# Altium PCB PCB1.pcbdoc (part 3 of 3)
Units mil, origin at the board's own origin, x right, y up, seen from the top; angles counter-clockwise.
Board outline 4439.01 x 4693.87 mil, 2 copper layers (Top Layer, Bottom Layer); 119 components, 135 nets, 555 pads, 196 vias.
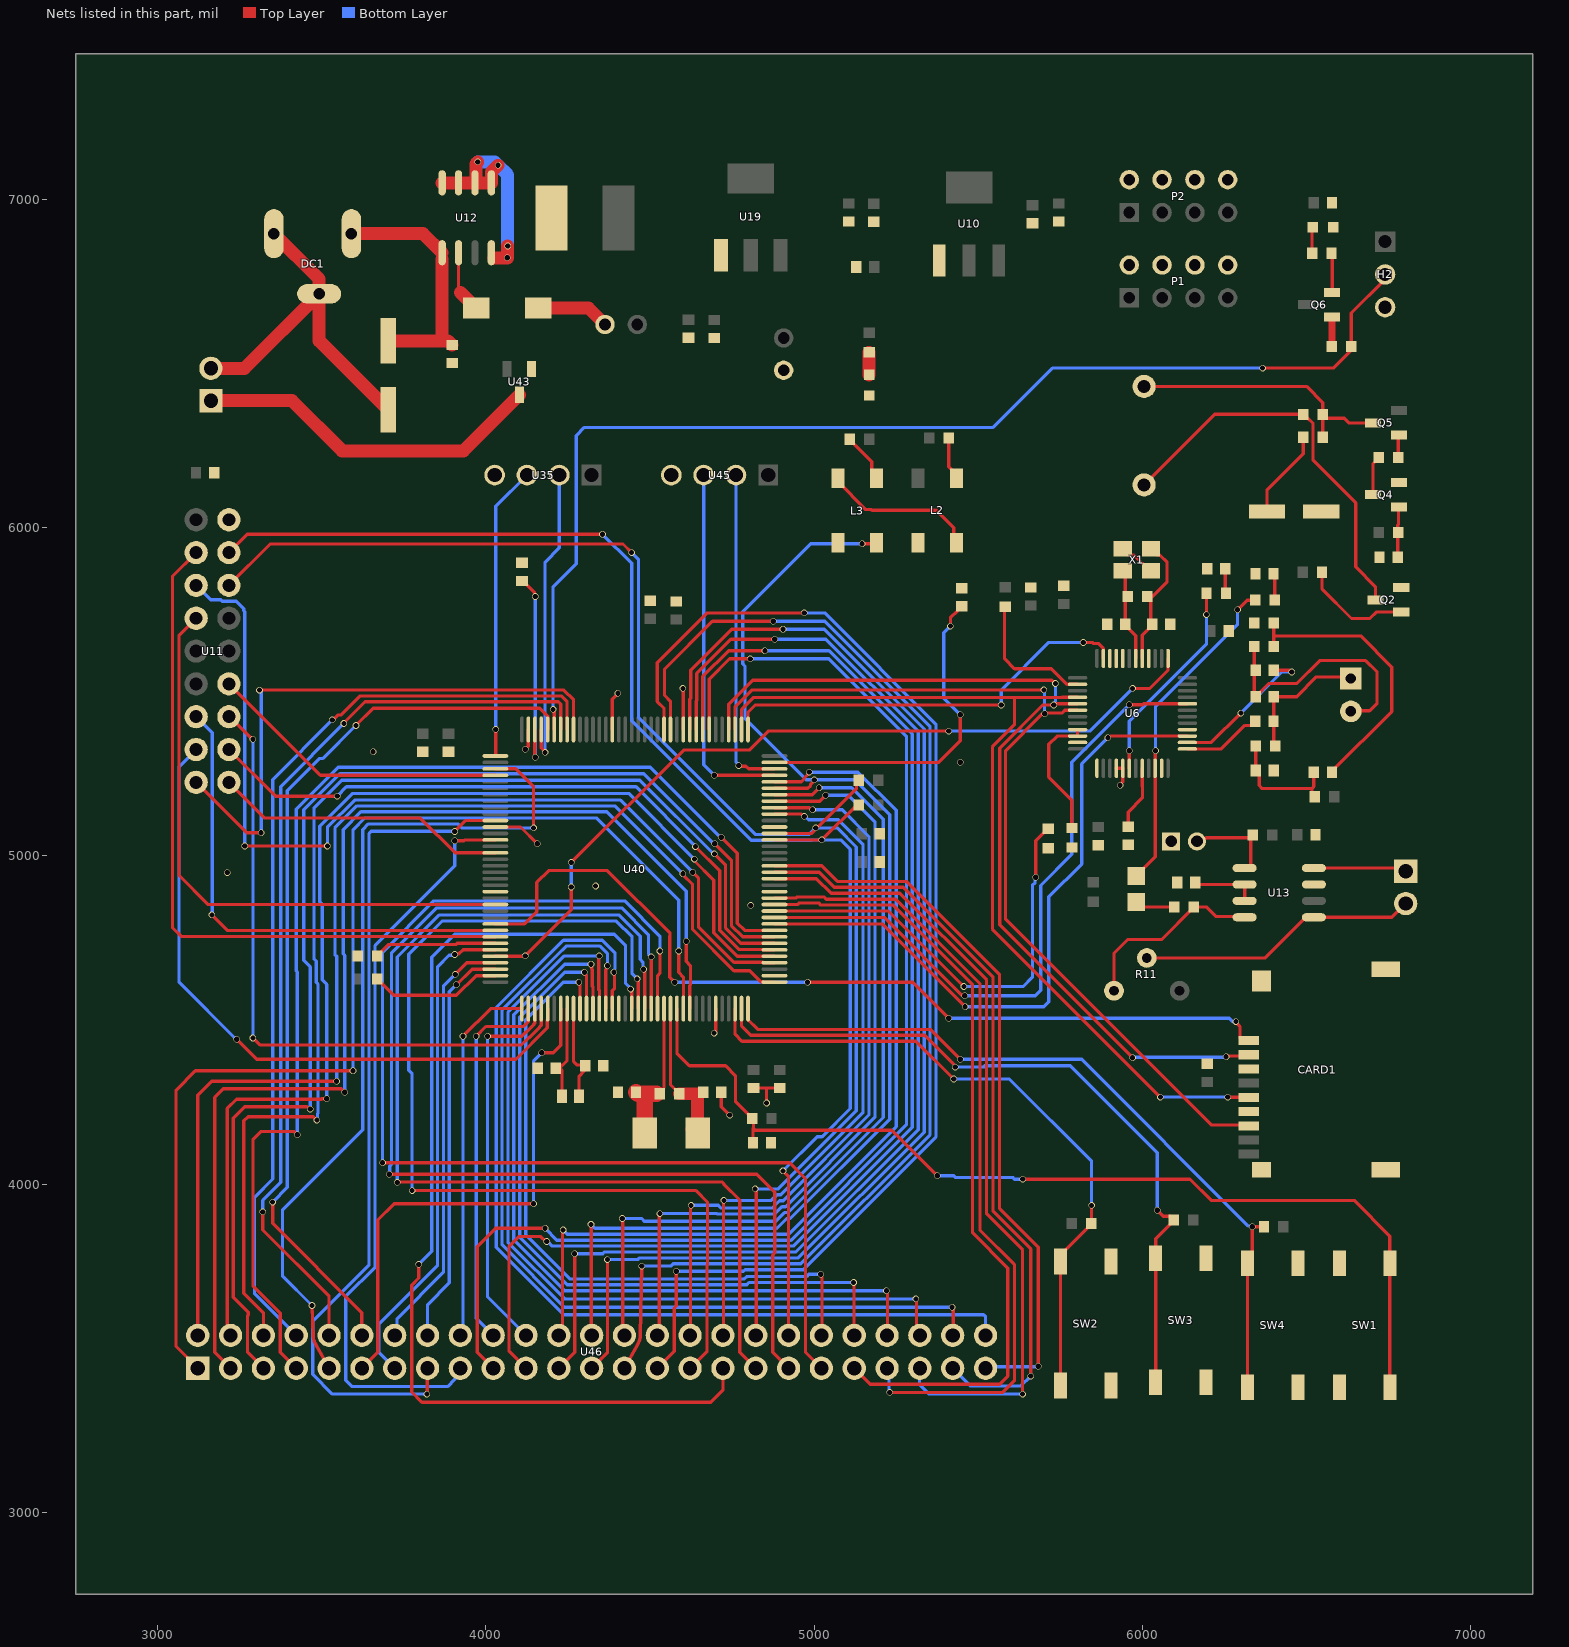
[diagram p2: the nets of this part, all layers, seen from the top]

## Via types
v1: diameter 20, hole 16, Top Layer to Bottom Layer, 196 vias

## Nets (pads, with @x,y where several pads share a name; then routed paths per layer and width w, separated by ;. In a path a pad name is that pad's centre, name@x,y a point inside that pad or via, vN(x,y) a via of type N, cw(c..) or ccw(c..) an arc to the next point about the centre after c; other vN are vias at no path point) (continued)
DCMI_D4: U11.12 U40.112 | length 927.1
  Top Layer w10: U11.12@3217,5523.87 3495.64,5245.23 U40.112@4028.7,5245.23
DCMI_D5: U11.13 U40.136 | length 1507.7
  Top Layer w10: v1(3165,4820) 3212.21,4772.79 U40.136@4028.7,4772.79
  Bottom Layer w10: U11.13@3117,5423.87 3165.87,5375 3165.87,4820.87 v1(3165,4820)
DCMI_D6: U11.14 U40.4 | length 1975.1
  Top Layer w10: U11.14@3217,5423.87 3219.06,5423.87 3287.94,5355 v1(3290,5355) ; v1(3290,4445) 3311.28,4423.72 4108.26,4423.72 4130.77,4446.23 4131.99,4446.23 4163.92,4478.16 4163.92,4479.38 4168.47,4483.93 U40.4@4168.47,4534.6
  Bottom Layer w10: v1(3290,4445) v1(3290,5355)
DCMI_D7: U11.15 U40.5 | length 2047.8
  Top Layer w10: v1(3241.08,4441.08) 3301.85,4380.32 4091.54,4380.32 4186.98,4475.77 4186.98,4499.3 4188.15,4500.46 U40.5@4188.15,4534.6
  Bottom Layer w10: U11.15@3117,5323.87 3065,5271.87 3065,4615 v1@3240,4440
DCMI_HREF: U11.5 U40.40 | length 2897.3
  Top Layer w10: v1(3265,5030) v1(3517,5030) ; v1(4630,4950) 4647.26,4932.74 4647.26,4783.67 4755.39,4675.54 4843.8,4675.54 4844.96,4674.37 U40.40@4879.1,4674.37
  Bottom Layer w10: U11.5@3117,5823.87 3160.87,5780 3192.38,5780 3196.94,5775.44 3239.56,5775.44 3262.18,5752.82 3262.18,5747.18 3265.43,5743.94 3265.43,5030.43 v1(3265,5030) ; v1(3517,5030) 3517,5087.46 3599.54,5170 4410,5170 v1(4630,4950)
DCMI_PCLK: U11.16 U40.42 | length 2043.3
  Top Layer w10: U11.16@3217,5323.87 3359,5181.87 v1(3546.87,5181.87) ; v1@4639.54,5026.84 4712,4954.38 4712,4772.54 4769.64,4714.91 4843.8,4714.91 4844.96,4713.74 U40.42@4879.1,4713.74
  Bottom Layer w10: v1(3546.87,5181.87) 3575,5210 4457.29,5210 4638.19,5029.1 v1(4638.19,5028.19)
DCMI_PWDN: U11.18 U40.124 | length 900.7
  Top Layer w10: U11.18@3217,5223.87 3325.87,5115 3800,5115 3905.99,5009.01 U40.124@4028.7,5009.01
DCMI_RESET: U11.7 U40.132 | length 1805.8
  Top Layer w10: U11.7@3117,5723.87 3065,5671.87 3065,4940 3153.47,4851.53 U40.132@4028.7,4851.53
DCMI_VSYNC: U11.3 U40.137 | length 2168
  Top Layer w10: U11.3@3117,5923.87 3045,5851.87 3045,4780.86 3071.58,4754.28 3993.4,4754.28 3994.56,4753.11 U40.137@4028.7,4753.11
DCMI_XCLK: U11.17 U40.100 | length 1758.3
  Top Layer w10: U11.17@3117,5223.87 3270.87,5070 v1(3315,5070) ; v1(3310,5505) 4237.15,5505 4266.89,5475.26 U40.100@4266.89,5385
  Bottom Layer w10: v1(3310,5505) 3310,5502.29 3315,5497.29 v1(3315,5070)
DREQ: U6.8 U40.47 | length 2076.8
  Top Layer w10: U40.47@4879.1,4812.16 5212.93,4812.16 5449.41,4575.68 5456.85,4575.68 v1(5458.76,4573.76) ; v1(5960,5460) 6001.08,5460 6004.48,5463.4 U6.8@6137.13,5463.4
  Bottom Layer w10: v1(5458.76,4573.76) 5673.76,4573.76 5690,4590 5690,4909.54 5785,5004.54 5785,5285 v1(5960,5460)
GND: C1.1 C2.1 C3.2 C9.2 C11.1 C12.1 C13.1 C14.2 C16.2 C17.2 C21.1 C23.1 C25.1 C26.1 C27.1 C28.1 C29.2 C30.2 C31.2 C37.2 C38.2 C39.2 C40.2 C41.2 C100.2 C101.2 C102.2 CARD1.3 CARD1.6 CARD1.10 CARD1.11 CARD1.12 CARD1.13 CN2.2 D3.2 DC1.2 DC1.3 H2.3 L2.3 L3.3 LED1.1 LED2.1 P1.2 P1.4 P1.6 P1.8 P2.2 P2.4 P2.6 P2.8 Q2.2 Q4.2 R4.2 R6.2 R13.2 R14.2 SW1.3 SW1.4 SW2.1 SW2.2 SW3.1 SW3.2 SW4.1 SW4.2 U6.4 U6.16 U6.20 U6.21 U6.22 U6.35 U6.37 U6.40 U6.41 U6.47 U7.2 U8.2 U9.2 U10.1 U11.2 U12.4 U12.5 U12.6 U12.7 U12.8 U13.7 U16.2 U17.1 U18.1 U19.1 U20.2 U21.2 U27.2 U28.2 U29.2 U35.4 U36.2 U37.2 U38.1 U39.1 U40.16 U40.31 U40.38 U40.51 U40.61 U40.83 U40.94 U40.107 U40.120 U40.130 U42.1 U43.1 U44.2 U45.4 X1.2 X1.4 | length 2934.9
  Top Layer w10: U40.120@4028.7,5087.75 4105.25,5087.75 v1(4156,5037) ; v1(4120,5325) 4129.1,5334.1 U40.107@4129.1,5385 ; U40.94@4385,5385 4385,5476.64 4402,5493.64 v1(4402,5495) ; v1(4600,5510) 4601.34,5508.66 4601.34,5385.2 U40.83@4601.54,5385 ; v1(4695,4460) 4699.96,4464.96 U40.31@4699.96,4534.6 ; U37.2@4717.22,4280 4717.22,4235.78 v1(4743,4210) ; C38.2@4815,4292.44 4855,4292.44 ; v1(4855,4247) 4855,4292.44 ; U28.2@4895,4292.44 4855,4292.44 ; U6.40@5920.6,5266.55 U6.41@5940.28,5266.55 5940.28,5225.48 5932,5217.19 v1(5932,5215) ; X1.2@5940,5935 5958.62,5916.38 5974.38,5916.38 6022.68,5868.07 X1.4@6026.62,5868.07
  Top Layer w39.37: CN2.2@3162,6485.16 3264.53,6485.16 DC1.3@3491.7,6712.32 ; DC1.2@3353.9,6895.42 3491.7,6757.62 DC1.3@3491.7,6712.32 ; C17.2@3702,6358.76 3491.7,6569.06 DC1.3@3491.7,6712.32 ; U12.8@3866.53,7050.37 U12.7@3916.53,7050.37 U12.6@3966.53,7050.37 ; v1(3975,7114) 3969.16,7108.16 3969.16,7053 U12.6@3966.53,7050.37 ; U12.4@4025.03,6822 v1(4065,6822) 4066.03,6823.03 v1(4066.03,6857.9) ; v1(4037,7103.87) 4016.53,7083.4 U12.5@4016.53,7050.37 U12.6@3966.53,7050.37 ; D3.2@4159.53,6669.24 4312.42,6669.24 U21.2@4362.79,6618.87
  Bottom Layer w39.37: v1(3975,7114) 4026.87,7114 v1(4037,7103.87) 4066.03,7074.84 v1(4066.03,6857.9)
  other v1: 4807,4849 4334,4908 3212,4949 5445,5285 3656,5317
IIC_SCL: U11.4 U40.59 U46.38 U48.2 | length 4476.8
  Top Layer w10: U11.4@3217,5923.87 3273.13,5980 v1(4355,5980) ; U40.59@4879.1,5048.38 v1(5023.38,5048.38) U48.2@5132.67,5157.67 ; v1(4905,4040) 4905,4038.64 4922,4021.64 U46.38@4922,3538.87
  Bottom Layer w10: v1(4355,5980) 4443.79,5891.21 4443.79,5411.21 4808,5047 4992.46,5047 4993.84,5048.38 v1(5023.38,5048.38) 5081.16,5048.38 5110.16,5019.39 5110.16,4230.16 5024.05,4144.05 5009.05,4144.05 v1(4905,4040)
IIC_SDA: U11.6 U40.60 U46.36 U47.2 | length 4638.8
  Top Layer w10: U11.6@3217,5823.87 3343.13,5950 4417.53,5950 v1(4443.76,5923.76) ; v1(4820,3985) 4820,3982.29 4823.5,3978.79 4823.5,3540.37 U46.36@4822,3538.87 ; U40.60@4879.1,5068.07 4993.07,5068.07 5128.85,5203.85 5128.85,5223.51 U47.2@5135.34,5230
  Bottom Layer w10: v1(4443.76,5923.76) 4465,5902.53 4465,5420 4820,5065 4985,5065 v1(5005,5085) 5070,5085 5128.16,5026.84 5128.16,4222.7 4890.46,3985 v1(4820,3985)
KEY0: R17.1 SW2.3 SW2.4 U40.34 | length 2047.8
  Top Layer w10: U40.34@4759.02,4534.6 4759.02,4455.98 4780,4435 5310,4435 v1(5425,4320) ; SW2.4@5750.23,3385.91 SW2.3@5750.23,3763.86 5750.23,3783.55 5833.78,3867.11 5833.78,3869.12 R17.1@5844.66,3880 5845,3880.34 v1(5845,3935)
  Bottom Layer w10: v1(5425,4320) 5595,4320 5845,4070 v1(5845,3935)
KEY1: R18.1 SW3.3 SW3.4 U40.35 | length 2239.5
  Top Layer w10: U40.35@4778.7,4534.6 4778.7,4481.3 4807,4453 5337,4453 v1@5431.82,4358.18 ; SW3.4@6040.23,3395.91 SW3.3@6040.23,3773.86 6040.23,3833.41 6095.68,3888.87 R18.1@6095.68,3890 6095.68,3891.13 6084.8,3902.01 6062.99,3902.01 v1(6045,3920)
  Bottom Layer w10: v1(5430,4356.36) 5516.36,4356.36 5520,4360 5780,4360 6045,4095 v1(6045,3920)
KEY2: R19.1 SW4.3 SW4.4 U40.36 | length 2362.3
  Top Layer w10: U40.36@4798.39,4534.6 4798.39,4500.74 4828.13,4471 5354,4471 v1(5445,4380) ; SW4.4@6320.23,3380.91 SW4.3@6320.23,3758.86 6334.91,3773.55 6334.91,3829.26 6335,3829.35 v1(6335,3870) R19.1@6370.34,3870
  Bottom Layer w10: v1(5445,4380) 5815,4380 6323.09,3871.91 6333.09,3871.91 v1(6335,3870)
LEFT: C15.1 U6.46 U15.1 | length 1005.4
  Top Layer w10: C15.1@5981.55,4938.24 5981.55,4939.42 6038.71,4996.59 U6.46@6038.71,5266.55 6038.83,5266.67 6038.83,5318.83 v1(6040,5320) ; v1(6290,5750) 6318.91,5778.91 U15.1@6343.95,5778.91
  Bottom Layer w10: v1(6040,5320) 6040,5455 6290,5705 v1(6290,5750)
NetBUZZER2_1: BUZZER2.1 Q5.3 R20.2 R21.2 | length 833.8
  Top Layer w10: BUZZER2.1@6005,6430 6500,6430 6549.66,6380.34 R20.2@6549.66,6345 R20.2@6549.66,6343.87 ; R21.2@6549.66,6275 R20.2@6549.66,6343.87 ; Q5.3@6702.56,6318.87 6628.8,6318.87 6614.68,6332.99 6560.54,6332.99 R20.2@6549.66,6343.87
NetBUZZER2_2: BUZZER2.2 Q2.3 R20.1 | length 1232.1
  Top Layer w10: BUZZER2.2@6005,6129.99 6220.01,6345 R20.1@6490.34,6345 6490.34,6343.87 6501.22,6332.99 6504.14,6332.99 6520,6317.13 6520,6205 6650,6075 6650,5880 6710,5820 Q2.3@6710,5780
NetC3_1: C3.1 C4.2 R1.2 R2.1 | length 371.1
  Top Layer w10: R1.2@6345.34,5335 6345.34,5260.34 C3.1@6345,5260 6355.75,5249.25 6355.75,5214.25 6365,5205 6516.58,5205 ; C4.2@6522.44,5255 6522.44,5210.86 6516.58,5205 ; R2.1@6525.34,5180 6516.58,5188.76 6516.58,5205
NetC4_1: C4.1 R3.1 R4.1 | length 867.8
  Top Layer w10: R3.1@6399.95,5637.3 6399.95,5673.09 ; R4.1@6399.95,5708.87 6399.95,5673.09 ; C4.1@6577.56,5255 6577.56,5256.97 6760,5439.41 6760,5575 6665,5670 6403.04,5670 6399.95,5673.09
NetC5_1: C5.1 C7.1 MIC1.2 R3.2 | length 769.6
  Top Layer w10: R3.2@6340.63,5637.3 6340.63,5489.25 C5.1@6344.88,5485 6384.88,5525 6470,5525 6540,5595 6680,5595 6715,5560 6715,5465 6692.14,5442.14 6637.14,5442.14 MIC1.2@6635,5440
NetC5_2: C5.2 C6.1 MIC1.1 R1.1 | length 413.9
  Top Layer w10: R1.1@6404.66,5335 6400,5339.66 C5.2@6400,5485 6470,5485 6530,5545 6630,5545 MIC1.1@6635,5540
NetC6_2: C6.2 U6.1 | length 243.2
  Top Layer w10: U6.1@6137.13,5325.6 6240.6,5325.6 6312.28,5397.28 6333.52,5397.28 6344.27,5408.03 C6.2@6344.27,5410
NetC7_2: C7.2 U6.2 | length 463.9
  Top Layer w10: U6.2@6137.13,5345.29 6210.29,5345.29 v1(6300,5435) ; C7.2@6400,5565 6447.29,5565 6452.29,5560 v1(6455,5560)
  Bottom Layer w10: v1(6300,5435) 6425,5560 v1(6455,5560)
NetC14_1: C14.1 U14.2 | length 75.9
  Top Layer w10: C14.1@6252.56,5875 6252.56,5802.1 U14.2@6254.66,5800
NetC15_2: C15.2 R9.1 | length 122.2
  Top Layer w10: C15.2@5981.55,4859.5 5997.18,4843.87 R9.1@6097.26,4843.87
NetC17_1: C17.1 C21.2 DC1.1 U12.1 | length 750.4
  Top Layer w39.37: DC1.1@3590.1,6895.42 3808.48,6895.42 U12.1@3866.53,6837.37 ; C17.1@3702,6568.99 3865.78,6568.99 ; U12.1@3865.78,6818.67 3865.78,6568.99 ; C21.2@3897,6556.43 3884.45,6568.99 3865.78,6568.99
NetC29_1: C29.1 U40.71 | length 1047.6
  Top Layer w10: U40.71@4879.1,5284.6 5379.6,5284.6 5445,5350 v1(5445,5430) ; v1(5415,5700) 5415,5725 5437.28,5747.28 5437.28,5749.25 5448.03,5760 C29.1@5450,5760
  Bottom Layer w10: v1(5415,5700) 5395,5680 5395,5480 v1(5445,5430)
NetC30_1: C30.1 U40.106 | length 640.7
  Top Layer w10: C30.1@4110,5837.44 4111.97,5837.44 4148.09,5801.32 4148.09,5791.91 v1(4150,5790) ; U40.106@4148.78,5385 4148.78,5301.22 v1(4150,5300)
  Bottom Layer w10: v1(4150,5300) v1(4150,5790)
NetC40_1: C40.1 R21.1 | length 272.2
  Top Layer w10: C40.1@6379.32,6048.83 6379.32,6114.32 6490.34,6225.34 R21.1@6490.34,6275
NetCN1_1: CN1.1 U13.8 | length 283.6
  Top Layer w10: U13.8@6522.61,4962.68 6792.6,4962.68 CN1.1@6802.2,4953.08
NetCN1_2: CN1.2 R11.2 U13.5 | length 857.4
  Top Layer w10: R11.2@6013.45,4688.87 6374.49,4688.87 6498.3,4812.68 U13.5@6522.61,4812.68 6760.22,4812.68 CN1.2@6802.2,4854.66
NetCN2_1: CN2.1 U43.3 | length 1074
  Top Layer w39.37: CN2.1@3162,6386.74 3409.14,6386.74 3562,6233.87 3931.37,6233.87 U43.3@4102,6404.5
NetD3_1: D3.1 L1.1 U12.2 | length 191.1
  Top Layer w10: U12.2@3916.53,6837.37 3916.53,6722.21 3922,6716.74
  Top Layer w39.37: 3922,6716.74 D3.1@3970.24,6668.5
NetL2_1: L2.1 R51.1 | length 132.3
  Top Layer w10: R51.1@5409.66,6273 5409.66,6184.98 5433.98,6160.65 L2.1@5433.98,6150.81
NetL2_4: L2.4 L3.2 | length 470.9
  Top Layer w10: L3.2@5071.93,6150.39 5071.93,6140.54 5157.48,6055 5174,6055 5176,6053 5372,6053 5425,6000 5425,5962.95 L2.4@5433.98,5953.96
NetL3_1: L3.1 R52.1 | length 152.5
  Top Layer w10: R52.1@5108.34,6269 5108.34,6267.87 5175.35,6200.86 5175.35,6165.07 L3.1@5190.03,6150.39
NetLED1_2: LED1.2 R23.1 | length 79.8
  Top Layer w10: R23.1@6516.84,6835.76 6516.84,6913.18 LED1.2@6518.52,6914.86
NetLED2_2: LED2.2 R24.1 | length 68.9
  Top Layer w39.37: R24.1@5167.55,6534.21 5167.62,6534.14 LED2.2@5167.62,6465.35
NetQ2_1: Q2.1 U5.1 | length 337.9
  Top Layer w10: U5.1@6547.28,5863.87 6547.28,5812.72 6637,5723 6693.27,5723 6712.87,5742.6 Q2.1@6788.74,5742.6
NetQ4_1: Q4.1 U41.1 U42.2 | length 154.6
  Top Layer w10: U42.2@6777.56,5910 6777.56,6007.56 6780,6010 6780,6061.71 Q4.1@6781.3,6063.01
NetQ4_3: Q4.3 R22.1 | length 120.7
  Top Layer w10: Q4.3@6702.56,6100.41 6702.56,6195.21 6720.09,6212.74 R22.1@6720.09,6213.87
NetQ5_1: Q5.1 R22.2 | length 68.4
  Top Layer w10: R22.2@6779.41,6213.87 6779.41,6279.59 Q5.1@6781.3,6281.47
NetQ6_1: Q6.1 R50.1 | length 90.3
  Top Layer w20: R50.1@6577.34,6552 6577.69,6552.35 6577.69,6641.66 Q6.1@6578.04,6642.01
NetQ6_2: Q6.2 R23.2 | length 119.7
  Top Layer w10: R23.2@6576.16,6835.76 6578.04,6833.88 Q6.2@6578.04,6716.81
NetR5_1: R5.1 U6.17 U8.1 X1.1 | length 395.4
  Top Layer w10: U6.17@5999.34,5601.19 5999.34,5672.37 6030,5703.03 U8.1@6030,5705 ; R5.1@6014.66,5790 R5.1@6024.04,5799.38 ; U8.1@6025,5715 6025,5785 6075,5835 6075,5895 6053.62,5916.38 6045.24,5916.38 X1.1@6026.62,5935
NetR5_2: R5.2 U6.18 U7.1 X1.3 | length 291.1
  Top Layer w10: X1.3@5940,5868.07 5947.56,5860.51 R5.2@5947.56,5790 ; R5.2@5955.34,5790 R5.2@5947.56,5790 ; U6.18@5979.65,5601.19 5979.65,5670.94 5947.56,5703.03 R5.2@5947.56,5790
NetR6_1: R6.1 U6.33 U6.34 | length 401.9
  Top Layer w10: R6.1@5785,5084.66 5785,5170 5715,5240 5715,5340 5739.97,5364.97 U6.34@5802.49,5364.97 U6.33@5802.49,5384.66
NetR7_1: R7.1 U6.26 | length 414.7
  Top Layer w10: R7.1@5582,5759.21 5580,5757.21 5580,5600 5610,5570 5722.53,5570 5769.95,5522.57 5802.37,5522.57 U6.26@5802.49,5522.45
NetR8_1: R8.1 U13.1 U18.2 | length 275.4
  Top Layer w10: U18.2@6166.13,5043.87 6174.76,5052.51 6192.05,5052.51 6194.55,5055 6330,5055 6330,4969.52 6323.16,4962.68 U13.1@6311.39,4962.68
NetR9_2: R9.2 R11.1 U13.4 | length 584.3
  Top Layer w10: R11.1@5913.45,4588.87 5913.45,4703.45 5955,4745 6058.84,4745 6156.58,4842.74 R9.2@6156.58,4843.87 6196.13,4843.87 6225,4815 6309.07,4815 U13.4@6311.39,4812.68
NetR12_1: R12.1 U40.143 | length 405.6
  Top Layer w10: R12.1@3669.32,4625 3669.32,4623.87 3680.2,4612.99 3681.33,4612.99 3719.32,4575 3910,4575 3969.8,4634.8 4028.5,4634.8 U40.143@4028.7,4635
NetR13_1: R13.1 U40.138 | length 376
  Top Layer w10: R13.1@3669.32,4695 3669.32,4696.13 3703.19,4730 3909.14,4730 3912.56,4733.42 U40.138@4028.7,4733.42
NetR14_1: R14.1 U40.48 | length 1365.8
  Top Layer w10: U40.48@4879.1,4831.85 5225.68,4831.85 5455.68,4601.85 v1(5456.14,4601.85) ; v1(5675,4935) 5675,5045.63 5711.83,5082.46 R14.1@5712.96,5082.46
  Bottom Layer w10: v1(5456.14,4601.85) 5636.85,4601.85 5665,4630 5665,4910 5673.09,4918.09 5673.09,4933.09 v1(5675,4935)
NetU6_42: U6.42 U14.1 | length 630.9
  Top Layer w10: U6.42@5959.97,5266.55 v1(5960,5320) ; v1(6195,5735) 6195,5799.66 U14.1@6195.34,5800
  Bottom Layer w10: v1(5960,5320) 5960,5410 6195,5645 v1(6195,5735)
NetU6_44: U6.44 U9.1 | length 195.9
  Top Layer w10: U9.1@5956.62,5088.87 5956.62,5133.24 6000,5176.62 6000,5210.76 5999.34,5211.41 U6.44@5999.34,5266.55
NetU13_2: U13.2 U13.3 U17.2 | length 202.5
  Top Layer w10: U17.2@6161.47,4918.87 6167.67,4912.68 U13.2@6311.39,4912.68 U13.3@6311.39,4862.68
NetU15_2: U15.2 U16.1 | length 81.5
  Top Layer w10: U16.1@6399.56,5858.87 6403.27,5855.16 U15.2@6403.27,5778.91
NetU38_2: U38.2 U40.8 X3.1 | length 278.8
  Top Layer w10: X3.1@4231.75,4267.53 4231.75,4346.07 4225.29,4352.53 4225.29,4354.5 4247.21,4376.42 U40.8@4247.21,4534.6
NetU39_2: U39.2 U40.9 X3.2 | length 287.3
  Top Layer w10: U40.9@4266.89,4534.6 4266.89,4373.11 4277.55,4362.45 4299.99,4362.45 U39.2@4302.44,4360 ; X3.2@4283.71,4267.53 4283.71,4329.1 U39.2@4300.17,4345.56
OSC_IN: R16.2 U36.1 U40.23 X2.2 | length 428.3
  Top Layer w10: R16.2@4530,4275 4540.88,4285.88 4540.88,4291.26 4542.48,4292.87 U40.23@4542.48,4534.6
  Top Layer w50: U36.1@4457.22,4280 4462.22,4275 4483.24,4275 R16.2@4519.66,4275 ; X2.2@4483.24,4155 4483.24,4253.98
OSC_OUT: R16.1 U37.1 U40.24 X2.1 | length 461.3
  Top Layer w10: U40.24@4562.17,4534.6 4562.17,4303.28 4589.32,4276.13 R16.1@4589.32,4275
  Top Layer w39.37: R16.1@4589.32,4275 4640.55,4275 4644.66,4270.89 X2.1@4644.66,4155
  Top Layer w50: X2.1@4632.26,4167.4 X2.1@4644.66,4155
PA3: U40.37 U46.2 | length 3616.9
  Top Layer w10: U46.2@3122,3538.87 3122,4270.32 3165,4313.32 v1(3545,4313.32) ; v1(4600,4945) 4600,4942.29 4629.26,4913.03 4629.26,4776.21 4755.47,4650 4804.06,4650 4837.57,4616.49 4843.79,4616.49 4844.96,4615.31 U40.37@4879.1,4615.31
  Bottom Layer w10: v1(3545,4313.32) 3545,4693.85 3540,4698.85 3540,5085 3607,5152 4393,5152 v1(4600,4945)
PA5: U40.41 U46.4 | length 3580.9
  Top Layer w10: U46.4@3222,3538.87 3212,3548.87 3212,4230.32 3240,4258.32 3498.7,4258.32 3500.01,4259.63 v1(3514.63,4259.63) ; v1(4635,4990) 4632.29,4987.29 4694,4925.59 4694,4765.09 4765.04,4694.05 U40.41@4879.1,4694.05
  Bottom Layer w10: v1(3514.63,4259.63) 3515,4260 3515,4608.12 3501,4622.12 3501,4852.51 3494,4859.51 3494,5089.91 3594.09,5190 4435,5190 v1(4635,4990)
PA7: U40.43 U46.6 | length 3623.1
  Top Layer w10: U46.6@3322,3538.87 3322,3608 3262.5,3667.5 3262.5,4192.5 3275.32,4205.32 3474.14,4205.32 3484.46,4195 v1(3485,4195) ; v1(4695.97,5005.64) 4730,4971.62 4730,4780 4776.58,4733.42 U40.43@4879.1,4733.42
  Bottom Layer w10: v1(3485,4195) 3486.91,4196.91 3486.91,4214.39 3488,4215.47 3488,4609.66 3483,4614.66 3483,4679.51 3476,4686.51 3476,5145.54 3560.46,5230 4468.91,5230 4693.27,5005.64 v1(4695.97,5005.64)
PA9: U40.101 U46.8 | length 2863.1
  Top Layer w10: v1(3532,5414) 3534.71,5414 3549.92,5429.21 3559.21,5429.21 3617,5487 4229.7,5487 4247.21,5469.49 U40.101@4247.21,5385
  Bottom Layer w10: U46.8@3422,3538.87 3295,3665.87 3295,3960.36 3350,4015.36 3350,5232 v1(3532,5414)
PA10: U40.102 U46.10 | length 2819
  Top Layer w10: v1(3320,3915) 3320,3860 3522,3658 U46.10@3522,3538.87 ; v1(3567.16,5403.21) 3567.16,5404.69 3631.47,5469 4221,5469 4227.52,5462.48 U40.102@4227.52,5385
  Bottom Layer w10: v1(3320,3915) 3320,3950 3375,4005 3375,5211.05 v1(3567.16,5403.21)
PA12: U40.104 U46.12 | length 2738.8
  Top Layer w10: v1(3350,3945) 3350,3880 3622,3608 U46.12@3622,3538.87 ; v1(3604,5397) 3657,5450 4163.51,5450 4187.95,5425.55 4187.95,5385.2 U40.104@4188.15,5385
  Bottom Layer w10: v1(3350,3945) 3395,3990 3395,5198.52 3493.28,5296.8 3503.8,5296.8 v1(3604,5397)
PB8: U40.139 U46.13 | length 1515.2
  Top Layer w10: v1(3904.67,4699.28) 3906.59,4701.2 3917.76,4701.2 3930.3,4713.74 U40.139@4028.7,4713.74
  Bottom Layer w10: U46.13@3722,3438.87 3673.57,3487.31 3673.57,3573.57 3675,3575 3852.57,3752.57 3852.57,4662.57 3887.37,4697.37 3902.76,4697.37 v1(3904.67,4699.28)
PC0: U40.26 U46.1 | length 3619.7
  Top Layer w10: U46.1@3122,3438.87 3055.87,3505 3055.86,4285.86 3115,4345 v1(3595,4345) ; v1(4587,4710) 4587,4645.28 4601.54,4630.74 U40.26@4601.54,4534.6
  Bottom Layer w10: v1(3595,4345) 3595,5080 3630,5115 4337.29,5115 4587,4865.29 v1(4587,4710)
PC1: U40.27 U46.3 | length 3589.8
  Top Layer w10: U46.3@3222,3438.87 3173.57,3487.31 3173.57,4263.88 3200,4290.32 3559.14,4290.32 3569.46,4280 v1(3570,4280) ; v1(4610,4740) 4610,4678.44 4623,4665.44 4623,4606.58 4621.22,4604.8 U40.27@4621.22,4534.6
  Bottom Layer w10: v1(3570,4280) 3570,4696.35 3565,4701.35 3565,5080 3619,5134 4367.79,5134 4610,4891.79 v1(4610,4740)
PC4: U40.44 U46.5 | length 3775.7
  Top Layer w10: U46.5@3322,3438.87 3273.57,3487.31 3273.57,3598.57 3275.86,3600.86 3275.86,3609.14 3230,3655 3230,4200.32 3265,4235.32 3454.14,4235.32 3456.14,4233.32 3457.29,4233.32 3462.29,4228.32 v1(3465,4228.32) ; v1(4697.07,5037.07) 4748,4986.14 4748,4787.46 4782.35,4753.11 U40.44@4879.1,4753.11
  Bottom Layer w10: v1(3465,4228.32) 3465,4661.35 3445,4681.35 3445,5140 3555,5250 4481.44,5250 4694.36,5037.07 v1(4697.07,5037.07)
PC5: U40.45 U46.7 | length 3734.8
  Top Layer w10: U46.7@3422,3438.87 3373.57,3487.31 3373.57,3606.43 3290,3690 3290,4135 3315.32,4160.32 3414.14,4160.32 3424.46,4150 v1(3425,4150) ; v1(4716.87,5056.87) 4766,5007.74 4766,4794.91 4788.12,4772.79 U40.45@4879.1,4772.79
  Bottom Layer w10: v1(3425,4150) 3425,4646.08 3422,4649.08 3422,5142.46 3549.54,5270 4501.03,5270 4714.16,5056.87 v1(4716.87,5056.87)
PC10: U40.111 U46.9 | length 2588
  Top Layer w10: v1(3470,3630) 3473.6,3537 ccw(c3522,3538.87) 3479.63,3515.42 U46.9@3522,3438.87 ; U40.111@4028.7,5264.92 4090.08,5264.92 4145,5210 v1(4145,5085)
  Bottom Layer w10: v1(3470,3630) 3380,3720 3380,3920 3625,4165 3625,5080 3642,5097 3914.53,5097 3926.53,5085 v1(4145,5085)
PC13: U40.7 U46.11 | length 1616.7
  Top Layer w10: U46.11@3622,3438.87 3670.43,3487.31 3670.43,3888.78 3669.61,3889.61 3720,3940 v1(4145,3940) ; v1(4170,4400) 4205,4400 4227.52,4422.52 U40.7@4227.52,4534.6
  Bottom Layer w10: v1(4145,3940) 4145,4375 v1(4170,4400)
PD5: U40.119 U46.15 | length 2573.7
  Top Layer w10: v1(3820,3360) 3821,3361 3821,3437.87 U46.15@3822,3438.87 ; v1(3905,5074) 3905,5075 3937.44,5107.44 U40.119@4028.7,5107.44
  Bottom Layer w10: v1(3820,3360) 3532.38,3360 3472.5,3419.88 3472.5,3582.5 3644,3754 3644,5068.14 3650.86,5075 3904,5075 v1(3905,5074)
PD6: U40.122 U46.17 | length 2296.1
  Top Layer w10: v1(3905,5046) 3932.82,5046 3935,5048.18 4028.5,5048.18 U40.122@4028.7,5048.38
  Bottom Layer w10: v1(3905,5046) 3905,4970 3662,4727 3662,3746.54 3573.01,3657.56 3573.01,3401.99 3592,3383 3883,3383 3904.78,3404.78 3904.78,3405.18 3922,3422.4 U46.17@3922,3438.87
PD10: U40.79 U46.19 | length 3946.9
  Top Layer w10: U46.19@4022,3438.87 3973.57,3487.31 3973.57,3808.57 4030,3865 v1(4180,3865) ; U40.79@4680.28,5385 4680.28,5538.25 4742.03,5600 v1(4805,5600) v1@4810.06,5600
  Bottom Layer w10: v1(4180,3865) 4216,3829 4929.46,3829 5281,4180.54 5281,4193.28 5281,5364 5045,5600 v1(4805,5600)
PD11: U40.80 U46.21 | length 3931.5
  Top Layer w10: U46.21@4122,3438.87 4070.43,3490.44 4070.43,3810.43 4100,3840 4167.29,3840 4182.29,3825 v1(4185,3825) ; U40.80@4660.59,5385 4660.59,5546.4 4739.19,5625 v1(4850,5625)
  Bottom Layer w10: v1(4185,3825) 4187.71,3825 4201.71,3811 4936.91,3811 5299,4173.09 5299,5371.46 5045.46,5625 v1(4850,5625)
PD12: U40.81 U46.23 | length 3788.9
  Top Layer w10: U46.23@4222,3438.87 4270.43,3487.31 4270.43,3787.57 v1(4270,3788) ; U40.81@4640.91,5385 4640.91,5471.93 4642,5473.02 4642,5555.64 4746.36,5660 v1@4877.08,5660
  Bottom Layer w10: v1(4270,3788) 4355.47,3788 4360.47,3793 4944.37,3793 5317,4165.63 5317,4178.37 5317,5378.91 5035.91,5660 v1(4880,5660)
PD13: U40.82 U46.25 | length 3771.1
  Top Layer w10: U46.25@4322,3438.87 4370.43,3487.31 4370.43,3769.57 v1(4370,3770) ; U40.82@4621.22,5385 4621.22,5477.69 4624,5480.47 4624,5565.49 4748.51,5690 v1@4900.74,5690
  Bottom Layer w10: v1(4370,3770) 4462.47,3770 4467.47,3775 4951.82,3775 5335,4158.18 5335,4170.91 5335,5386.37 5031.37,5690 v1(4905,5690)
PD14: U40.85 U46.27 | length 3804.3
  Top Layer w10: U46.27@4422,3438.87 4464.37,3515.42 ccw(c4422,3538.87) 4470.42,3537.83 v1(4475,3750) ; U40.85@4562.17,5385 4562.17,5470.85 4544,5489.02 4544,5569 4690,5715 v1(4875,5715)
  Bottom Layer w10: v1(4475,3750) 4563.47,3750 4570.47,3757 4959.28,3757 5353,4150.72 5353,4163.46 5353,5393.82 5031.82,5715 v1(4875,5715)
PD15: U40.86 U46.29 | length 3801.4
  Top Layer w10: U46.29@4522,3438.87 4573.57,3490.44 4573.57,3622.39 4580,3628.82 v1(4580,3734) ; U40.86@4542.48,5385 4542.48,5449.52 4522,5470 4522,5588 4674,5740 v1(4970,5740)
  Bottom Layer w10: v1(4580,3734) 4784.43,3734 4789.43,3739 4966.73,3739 5371,4143.27 5371,5401.28 5032.28,5740 v1(4970,5740)
PE0: U40.141 U46.14 | length 1313.4
  Top Layer w10: v1(3906.24,4638.76) 3941.84,4674.37 U40.141@4028.7,4674.37
  Bottom Layer w10: U46.14@3722,3538.87 3729.31,3546.18 3729.31,3589.31 3870.57,3730.57 3870.57,4603.09 v1(3906.24,4638.76)
PE1: U40.142 U46.16 | length 1243.3
  Top Layer w10: v1(3909.74,4607.26) 3910.26,4607.26 3957.68,4654.68 U40.142@4028.7,4654.68
  Bottom Layer w10: U46.16@3822,3538.87 3822,3632 3888.57,3698.57 3888.57,4586.09 v1(3909.74,4607.26)
PE2: U40.1 U46.18 | length 1149.2
  Top Layer w10: v1@3927.5,4447.5 v1(3930,4450) 4014.6,4534.6 U40.1@4109.41,4534.6
  Bottom Layer w10: U46.18@3915,3525 3930,3540 v1(3930,4450)
PE3: U40.2 U46.20 | length 1150.4
  Top Layer w10: v1(3970,4450) 4000,4480 4113.63,4480 4115.86,4482.23 4117.08,4482.23 4128.9,4494.06 4128.9,4534.4 U40.2@4129.1,4534.6
  Bottom Layer w10: v1(3970,4450) 3970,3590.87 U46.20@4022,3538.87
PE4: U40.3 U46.22 | length 1165.4
  Top Layer w10: v1(4005,4450) 4109.09,4450 4123.32,4464.23 4124.53,4464.23 4145.92,4485.62 4145.92,4486.83 4148.58,4489.5 4148.58,4534.4 U40.3@4148.78,4534.6
  Bottom Layer w10: v1(4005,4450) 4005,3655.87 U46.22@4122,3538.87
PE10: U40.63 U46.34 | length 2072
  Top Layer w10: U46.34@4722,3538.87 4723.5,3540.37 4723.5,3948.5 v1(4725,3950) ; U40.63@4879.1,5127.12 4960.17,5127.12 4967.29,5120 v1(4970,5120)
  Bottom Layer w10: v1(4725,3950) 4869.89,3950 4886.89,3967 4897.91,3967 5149,4218.09 5149,5034.38 5073.38,5110 4982.71,5110 4972.71,5120 v1(4970,5120)
PE11: U40.64 U46.32 | length 2232.7
  Top Layer w10: U46.32@4622,3538.87 4623.5,3540.37 4623.5,3933.5 v1(4625,3935) ; U40.64@4879.1,5146.81 4985.48,5146.81 4992.29,5140 v1(4995,5140)
  Bottom Layer w10: v1(4625,3935) 4707.47,3935 4715.47,3927 4872.35,3927 4894.35,3949 4905.37,3949 5167,4210.63 5167,5058.8 5085.8,5140 v1(4995,5140)
PE12: U40.65 U46.30 | length 2399.4
  Top Layer w10: U46.30@4522,3538.87 4528.09,3544.96 4528.09,3908.09 v1(4530,3910) ; U40.65@4879.1,5166.49 5016.78,5166.49 v1(5035,5184.71)
  Bottom Layer w10: v1(4530,3910) 4703.68,3910 4704.68,3909 4879.8,3909 4901.8,3931 4912.82,3931 5185,4203.18 5185,5104.04 5104.32,5184.71 v1(5035,5184.71)
PE13: U40.66 U46.28 | length 2577
  Top Layer w10: v1(4415,3895) 4416.91,3893.09 4416.91,3543.96 U46.28@4422,3538.87 ; U40.66@4879.1,5186.18 4994.11,5186.18 5015,5207.07 v1(5015,5207.71)
  Bottom Layer w10: v1(4415,3895) 4474.62,3895 4482.62,3887 4883.26,3887 4909.26,3913 4920.28,3913 5210,4202.72 5210,5111.56 5113.85,5207.71 v1(5015,5207.71)
PE14: L3.4 U40.67 U46.26 | length 3840.3
  Top Layer w10: v1(4320,3877) 4321,3876 4321,3539.87 U46.26@4322,3538.87 ; U40.67@4879.1,5205.86 4980.86,5205.86 4989.04,5214.04 4989.04,5217.69 5000,5228.65 v1(5000,5231.36) ; v1(5146,5951) 5187.5,5951 L3.4@5190.03,5953.54
  Bottom Layer w10: v1(4320,3877) 4332,3865 4886.72,3865 4916.72,3895 4927.73,3895 5230,4197.27 5230,5125 5123.64,5231.36 v1(5000,5231.36) 4999.36,5232 4975.47,5232 4789,5418.47 4789,5578.26 4782,5585.26 4782,5744 4989,5951 v1(5146,5951)
PE15: U40.68 U46.24 | length 2880.5
  Top Layer w10: U46.24@4222,3538.87 4233.09,3549.96 4233.09,3858.09 v1(4235,3860) ; U40.68@4879.1,5225.55 4960.55,5225.55 4968.94,5233.94 4968.94,5236.24 4985,5252.29 v1(4985,5255)
  Bottom Layer w10: v1(4235,3860) 4248,3847 4922,3847 5250,4175 5250,5138.44 5133.44,5255 v1(4985,5255)
PF0: U40.10 U46.40 | length 2095.5
  Top Layer w10: v1(4283.26,4615) 4283.26,4612.29 4286.58,4608.97 U40.10@4286.58,4534.6 ; v1(5020,3725) 5020,3722.29 5023.5,3718.79 5023.5,3540.37 U46.40@5022,3538.87
  Bottom Layer w10: v1(4283.26,4615) 4235.46,4615 4121,4500.54 4121,3844.91 4254.91,3711 4786.88,3711 4793.88,3718 4976.83,3718 4983.83,3725 v1(5020,3725)
PF1: U40.11 U46.42 | length 2279
  Top Layer w10: v1(4300,4645) 4300,4642.29 4306.26,4636.03 U40.11@4306.26,4534.6 ; v1(5120,3700) 5121,3699 5121,3539.87 U46.42@5122,3538.87
  Bottom Layer w10: v1(4300,4645) 4240,4645 4103,4508 4103,3837.46 4247.46,3693 4794.34,3693 4801.34,3700 v1(5120,3700)
PF2: U40.12 U46.44 | length 2459.7
  Top Layer w10: v1(4320,4670) 4321.91,4668.09 4321.91,4655.61 4324.26,4653.27 4324.26,4602.95 4325.95,4601.26 U40.12@4325.95,4534.6 ; v1(5220,3675) 5220,3672.29 5223.5,3668.79 5223.5,3540.37 U46.44@5222,3538.87
  Bottom Layer w10: v1(4320,4670) 4239.54,4670 4085,4515.46 4085,3830 4240,3675 v1(5220,3675)
PF3: U40.13 U46.46 | length 2641.7
  Top Layer w10: v1(4345,4695) 4343.95,4693.95 4343.95,4591.68 4345.63,4590 U40.13@4345.63,4534.6 ; v1(5310,3650) 5311.91,3648.09 5311.91,3548.96 U46.46@5322,3538.87
  Bottom Layer w10: v1(4345,4695) 4239.09,4695 4067,4522.91 4067,3822.54 4239.54,3650 v1(5310,3650)
PF4: U40.14 U46.48 | length 2834
  Top Layer w10: U40.14@4365.32,4534.6 4365.32,4652.85 4368.09,4655.61 4368.09,4663.09 v1(4370,4665) ; v1(5420,3625) 5420,3622.29 5423.5,3618.79 5423.5,3540.37 U46.48@5422,3538.87
  Bottom Layer w10: v1(4370,4665) 4370,4702.53 4347.53,4725 4245,4725 4233,4713 4231.63,4713 4049,4530.37 4049,3815.09 4239.09,3625 v1(5420,3625)
PF5: U40.15 U46.50 | length 3003.6
  Top Layer w10: U40.15@4385,4534.6 4385,4588.97 4391.35,4595.32 4391.35,4643.65 v1(4390,4645)
  Bottom Layer w10: v1(4390,4645) 4391.91,4646.91 4391.91,4654.39 4393,4655.47 4393,4704.98 4354.98,4743 4236.18,4743 4031,4537.82 4031,3807.63 4236.63,3602 5516.14,3602 5522,3596.14 U46.50@5522,3538.87
PF6: U40.18 U46.33 | length 3227.4
  Top Layer w10: v1(3795,3755) 3795,3713.77 3773.57,3692.34 3773.57,3366.43 3805,3335 4685,3335 4722,3372 U46.33@4722,3438.87 ; v1(4440.74,4594.06) 4440.74,4591.35 4443.86,4588.23 4443.86,4534.8 U40.18@4444.06,4534.6
  Bottom Layer w10: v1(3795,3755) 3834.57,3794.57 3834.57,4690.66 3904.91,4761 4391.54,4761 4425,4727.54 4425,4612.51 4440.74,4596.77 v1(4440.74,4594.06)
PF7: U40.19 U46.31 | length 3134.9
  Top Layer w10: v1(3775,3980) 4640,3980 4675,3945 4675,3754.17 4673.57,3752.74 4673.57,3490.44 U46.31@4622,3438.87 ; v1(4460.43,4625) 4460.43,4622.29 4463.74,4618.98 U40.19@4463.74,4534.6
  Bottom Layer w10: v1(3775,3980) 3775,4336.35 3765,4346.35 3765,4700 3866.11,4801.11 4397.18,4801.11 4445,4753.28 4445,4640.43 v1(4460.43,4625)
PF8: U40.20 U46.35 | length 3332.6
  Top Layer w10: v1(3730,4005) 3731.43,4006.43 4719.14,4006.43 4725,4000.58 4725,4000 4773.57,3951.43 4773.57,3487.31 U46.35@4822,3438.87 ; v1(4480.11,4654.22) 4480.11,4651.51 4483.43,4648.19 U40.20@4483.43,4534.6
  Bottom Layer w10: v1(3730,4005) 3730,4691.72 3858.28,4820 4405,4820 4470,4755 4470,4684.22 4478.2,4676.02 4478.2,4656.13 v1(4480.11,4654.22)
PF9: U40.21 U46.37 | length 3536.3
  Top Layer w10: v1(3705,4030) 4825,4030 4880,3975 4880,3790.11 4873.57,3783.67 4873.57,3487.31 U46.37@4922,3438.87 ; U40.21@4503.11,4534.6 4503.31,4534.8 4503.31,4691.21 v1(4503.95,4691.86)
  Bottom Layer w10: v1(3705,4030) 3706.91,4031.91 3706.91,4054.39 3712,4059.47 3712,4703.72 3724.9,4716.61 3849.5,4841.21 4413.79,4841.21 4495,4760 4495,4700.82 v1(4503.95,4691.86)
PF10: U40.22 U46.39 | length 3725.4
  Top Layer w10: v1(3685,4065) 4925,4065 4973.57,4016.43 4973.57,3487.31 U46.39@5022,3438.87 ; U40.22@4522.8,4534.6 4522.8,4635.24 4530,4642.44 v1(4530,4710)
  Bottom Layer w10: v1(3685,4065) 3685,4706.72 3840.71,4862.43 4422.57,4862.43 4530,4755 v1(4530,4710)
PF11: U40.49 U46.41 | length 2444.5
  Top Layer w10: U40.49@4879.1,4851.53 4949.49,4851.53 4954.44,4856.48 5013.52,4856.48 5020.15,4849.85 5240.66,4849.85 5482.63,4607.88 5482.63,3851.24 5590,3743.87 5590,3415 5565,3390 5170.87,3390 U46.41@5122,3438.87
PF12: U40.50 U46.43 | length 2462.5
  Top Layer w10: U40.50@4879.1,4871.22 4943.72,4871.22 4946.98,4874.48 5030.52,4874.48 5037.15,4867.85 5248.12,4867.85 5505,4610.97 5505,3860 5610,3755 5610,3400 5575,3365 v1(5230,3365)
  Bottom Layer w10: U46.43@5222,3438.87 5228.09,3432.79 5228.09,3366.91 v1(5230,3365)
PF13: U40.53 U46.45 | length 2457.5
  Top Layer w10: U40.53@4879.1,4930.27 5006.88,4930.27 5051.3,4885.85 5261.3,4885.85 5525.31,4621.84 5525.31,3909.01 5635,3799.32 v1(5635,3360)
  Bottom Layer w10: U46.45@5322,3438.87 5321,3437.87 5321,3389 5350,3360 v1(5635,3360)
PF14: U40.54 U46.47 | length 2333.8
  Top Layer w10: U40.54@4879.1,4949.96 5015.04,4949.96 5061.15,4903.85 5271.15,4903.85 5545,4630 5545,3917.17 5660,3802.17 v1(5660,3415)
  Bottom Layer w10: U46.47@5422,3438.87 5475.87,3385 5630,3385 v1(5660,3415)
PF15: U40.55 U46.49 | length 2228.6
  Top Layer w10: U40.55@4879.1,4969.64 5023.19,4969.64 5070.98,4921.85 5280.98,4921.85 5564.68,4638.15 5564.68,3925.32 5683,3807 v1(5683,3445)
  Bottom Layer w10: U46.49@5522,3438.87 5526.21,3443.09 5681.09,3443.09 v1(5683,3445)
RESET: C31.1 R15.1 SW1.1 SW1.2 U40.25 | length 3105.4
  Top Layer w10: U40.25@4581.85,4534.6 4581.85,4398.15 4620,4360 4730,4360 4760,4330 4760,4251.81 4810.68,4201.13 R15.1@4810.68,4200 4814.95,4195.73 4814.95,4170.05 ; C31.1@4813.52,4126.13 4813.52,4168.62 4814.95,4170.05 ; v1(5375,4025) 5235.81,4164.19 4820.81,4164.19 4814.95,4170.05 ; v1(5635.5,4015) 6145,4015 6210,3950 6645,3950 6753.77,3841.22 SW1.1@6753.77,3758.86 SW1.2@6753.77,3380.91
  Bottom Layer w10: v1(5375,4025) 5425,4025 5430,4020 5605,4020 5610,4015 v1(5635.5,4015)
SD_CS: CARD1.1 U40.135 | length 2730.7
  Top Layer w10: U40.135@4028.7,4792.48 4117.48,4792.48 4155,4830 4155,4918.78 4191.22,4955 4370,4955 4560.86,4764.14 4560.86,4755.86 4560,4755 4560,4630 v1(4575,4615) ; v1(4980,4615) 5300,4615 v1(5410,4505) ; v1(6285,4495) 6285,4492.29 6297.04,4480.25 6297.04,4446.04 6305.82,4437.26 CARD1.1@6323.54,4437.26
  Bottom Layer w10: v1(4575,4615) v1(4980,4615) ; v1(5410,4505) 6265,4505 6275.86,4494.14 6284.14,4494.14 v1(6285,4495)
SPI2_MISO: CARD1.7 U6.30 U40.75 | length 2882.1
  Top Layer w10: U40.75@4759.02,5385 4759.02,5454.02 4810,5505 5699.5,5505 v1(5700,5505.5) ; v1@5700,5435 5755,5435 5763.71,5443.71 U6.30@5802.49,5443.71 ; v1(5702.18,5432.82) 5700.27,5430.9 5693.2,5430.9 5583,5320.71 5583,4807 6210,4180 CARD1.7@6315,4180
  Bottom Layer w10: v1(5700,5505.5) 5701.91,5503.59 5701.91,5433.09 v1(5702.18,5432.82)
SPI2_MOSI: CARD1.2 U6.29 U40.76 | length 2917.9
  Top Layer w10: U40.76@4739.33,5385 4739.33,5462.18 4812.15,5535 5724.14,5535 5734.14,5525 v1(5735,5525) ; U6.29@5802.49,5463.4 5736.61,5463.4 5732.71,5459.5 v1(5730,5459.5) 5696.34,5459.5 5565,5328.16 5565,4790 v1(5970,4385) ; v1(6255,4388) 6256.91,4389.91 6300.87,4389.91 CARD1.2@6305,4394.04
  Bottom Layer w10: v1(5730,5459.5) 5730,5462.21 5735,5467.21 v1(5735,5525) ; v1(5970,4385) 5971.5,4386.5 6253.5,4386.5 v1(6255,4388)
SPI2_SCK: CARD1.5 U6.28 U40.74 | length 2826.3
  Top Layer w10: U40.74@4778.7,5385 4778.7,5445.87 4815.33,5482.5 5610,5482.5 ; U6.28@5802.49,5483.08 5755.58,5483.08 5755,5482.5 5610,5482.5 ; v1(6055,4265) 5543.04,4776.96 5543.04,5331.66 5610,5398.62 5610,5482.5 ; v1(6260,4265) 6260.47,4264.53 6323.07,4264.53 CARD1.5@6323.54,4264.06
  Bottom Layer w10: v1(6055,4265) v1(6260,4265)
SR501: H2.2 R50.2 U40.103 | length 3660.3
  Top Layer w10: v1(4204.52,5446) 4204.52,5443.29 4207.84,5439.97 U40.103@4207.84,5385 ; v1(6366,6486) 6582,6486 R50.2@6638,6542 ; R50.2@6636,6551 6636,6653.82 6739.43,6757.25 H2.2@6739.43,6771.32
  Bottom Layer w10: v1(4204.52,5446) 4204.52,5819.52 4275,5890 4275,6280 4300,6305 5545,6305 5726,6486 v1(6366,6486)
SWCLK: U35.3 U40.109 | length 896.1
  Top Layer w10: U40.109@4028.7,5304.29 4029.53,5304.29 4030,5304.76 v1(4030,5385)
  Bottom Layer w10: v1(4030,5385) 4030,6065 U35.3@4125,6160
SWDIO: U35.2 U40.105 | length 937.8
  Top Layer w10: U40.105@4168.47,5385 4168.47,5329.24 4180,5317.71 v1(4180,5315)
  Bottom Layer w10: v1(4180,5315) 4180,5895 4223.43,5938.43 U35.2@4223.42,6159.99
USART3_RX: U40.70 U45.2 | length 1001.8
  Top Layer w10: v1(4770,5275) 4771.91,5273.09 4791.83,5273.09 4800,5264.92 U40.70@4879.1,5264.92
  Bottom Layer w10: U45.2@4761.57,6159.99 4761.57,5286.14 4770,5277.71 v1(4770,5275)
USART3_TX: U40.69 U45.3 | length 1111.9
  Top Layer w10: v1(4695.23,5245.23) U40.69@4879.1,5245.23
  Bottom Layer w10: U45.3@4663.15,6160 4663.15,5277.31 v1(4695.23,5245.23)
VS_RET: U6.3 U40.46 | length 2070.4
  Top Layer w10: U40.46@4879.1,4792.48 5207.15,4792.48 v1(5459.63,4540) ; v1(5895,5360) 5897.71,5360 5902.68,5364.97 U6.3@6137.13,5364.97
  Bottom Layer w10: v1(5459.63,4540) 5700,4540 5715,4555 5715,4875 5815,4975 5815,5280 v1(5895,5360)
XCS: U6.23 U40.73 | length 1288.2
  Top Layer w10: U40.73@4798.39,5385 4798.39,5437.71 4820.18,5459.5 v1(5570,5459.5) ; v1(5820,5650) 5847,5650 5850,5647 5865.85,5647 5881.11,5631.74 5881.11,5601.31 U6.23@5881.23,5601.19
  Bottom Layer w10: v1(5570,5459.5) 5570,5505 5715,5650 v1(5820,5650)
XDCS: U6.13 U40.140 | length 2531.3
  Top Layer w10: U40.140@4028.7,4694.05 4028.9,4694.25 4119.25,4694.25 v1(4120,4695) 4260,4835 v1(4260,4905) ; v1(4260,4980) 4602.29,5322.29 4802.29,5322.29 4860,5380 v1(5410,5380) ; v1(5970,5510) 6023.09,5510 6077.96,5564.87 6077.96,5601.07 U6.13@6078.08,5601.19
  Bottom Layer w10: v1(4260,4905) v1(4260,4980) ; v1(5410,5380) 5840,5380 v1(5970,5510)
pads on no net: CARD1.8 CARD1.9 L2.2 R11.3 U6.9 U6.10 U6.11 U6.12 U6.15 U6.25 U6.27 U6.36 U6.39 U6.48 U40.56 U40.57 U40.58 U40.77 U40.78 U40.87 U40.88 U40.89 U40.90 U40.91 U40.92 U40.93 U40.110 U40.113 U40.114 U40.115 U40.116 U40.117 U40.118 U40.123 U40.125 U40.126 U40.127 U40.128 U40.129 U40.133 U40.134

## Polygon pours and split planes (outlines as drawn)
GND on Bottom Layer "*" (solid, pour order 1): 3038,7160 3037,7159 3037,3299 6900,3299 6904,3303 6901,3306 6901,7161
GND on Top Layer "GND_L01_P000" (solid, pour order 0): 3036,7161 3037,7160 3037,3298 6880.45,3298 6903.05,3320.6 6903,3320.65 6903,7134 6874,7163

## Keep-outs
Board Outline Layer:
  lines w10: 3002,3256.87 6939.01,3256.87 6939.01,7193.87 3002,7193.87 3002,3256.87

## Other copper
Top Layer:
  region net NetD3_1: 3937,6768.87 4057,6768.87 4162,6873.87 4162,7023.87 4177,7038.87 4237,7038.87 4247,7028.87 4247,6808.87 4160.29,6722.16 4072.98,6722.16 4012,6661.18 4012,6638.87 3999.87,6638.87 3922,6716.74 3937,6731.74 3937,6768.87

## Silkscreen, mask and mechanical layers (free items; w line width, h text height)
Top Silkscreen Layer:
  circle w10: c5275.12,3882.26 r108.27
  circle w10: c3525.12,3882.26 r108.27
  circle w10: c5270.12,5682.26 r108.27
  circle w10: c3527.64,5686.06 r108.27
  pour cut-out: 5166.86,3882.26 ccw(c5275.12,3882.26) 5275.12,3773.99 ccw(c5275.12,3882.26) 5383.39,3882.26 ccw(c5275.12,3882.26) 5275.12,3990.53 ccw(c5275.12,3882.26)
  pour cut-out: 3525.12,3773.99 cw(c3525.12,3882.26) 3416.86,3882.26 cw(c3525.12,3882.26) 3525.12,3990.53 cw(c3525.12,3882.26) 3633.39,3882.26 cw(c3525.12,3882.26)
  pour cut-out: 5270.12,5573.99 cw(c5270.12,5682.26) 5161.86,5682.26 cw(c5270.12,5682.26) 5270.12,5790.53 cw(c5270.12,5682.26) 5378.39,5682.26 cw(c5270.12,5682.26)
  pour cut-out: 3527.64,5577.8 cw(c3527.64,5686.06) 3419.37,5686.06 cw(c3527.64,5686.06) 3527.64,5794.33 cw(c3527.64,5686.06) 3635.9,5686.06 cw(c3527.64,5686.06)
  lines w10: 3448.9,3804.8 3448.9,5764.8 5353.9,5764.8 5353.9,3804.8 3448.9,3804.8
  text "GND" at 5808.94,7048.94 h31.5
  text "5V" at 5833.94,6938.94 h31.5
  text "GND" at 5798.94,6788.94 h31.5
  text "3V3" at 5798.94,6678.94 h31.5
  text "IIC_SDA" at 4837.53,3605.91 h39.37 r90
  text "IIC_SCL" at 4934.53,3603.91 h39.37 r90
Bottom Silkscreen Layer:
  drawing of 2305 lines, arcs and shapes, not listed
Mechanical 6:
  circle w1: c3527.64,3883.54 r68.9
  circle w1: c5275.15,3883.54 r68.9
  circle w1: c5275.15,5686.06 r68.9
  circle w1: c3527.64,5686.06 r68.9

## Text inside footprints (layer, text, board x,y; h text height)
BUZZER2: Top Silkscreen Layer "+" at 6011.51,6519.99 h32.69 r270
MIC1: Top Silkscreen Layer "-" at 6657.18,5375 h19.61 r90
U20: Top Silkscreen Layer "-" at 4950.65,6488.57 h25.74 r270; Top Silkscreen Layer "+" at 4955.65,6608.57 h25.74 r270
U21: Top Silkscreen Layer "-" at 4372,6575.23 h25.74 r180; Top Silkscreen Layer "+" at 4492,6570.23 h25.74 r180